# Altium PCB BeagleBoneBlack.PcbDoc
Units mil, origin at the board's own origin, x right, y up, seen from the top; angles counter-clockwise.
Board outline 2350 x 1350 mil, 2 copper layers (Top Layer, Bottom Layer); 14 components, 13 nets, 100 pads, 10 vias.
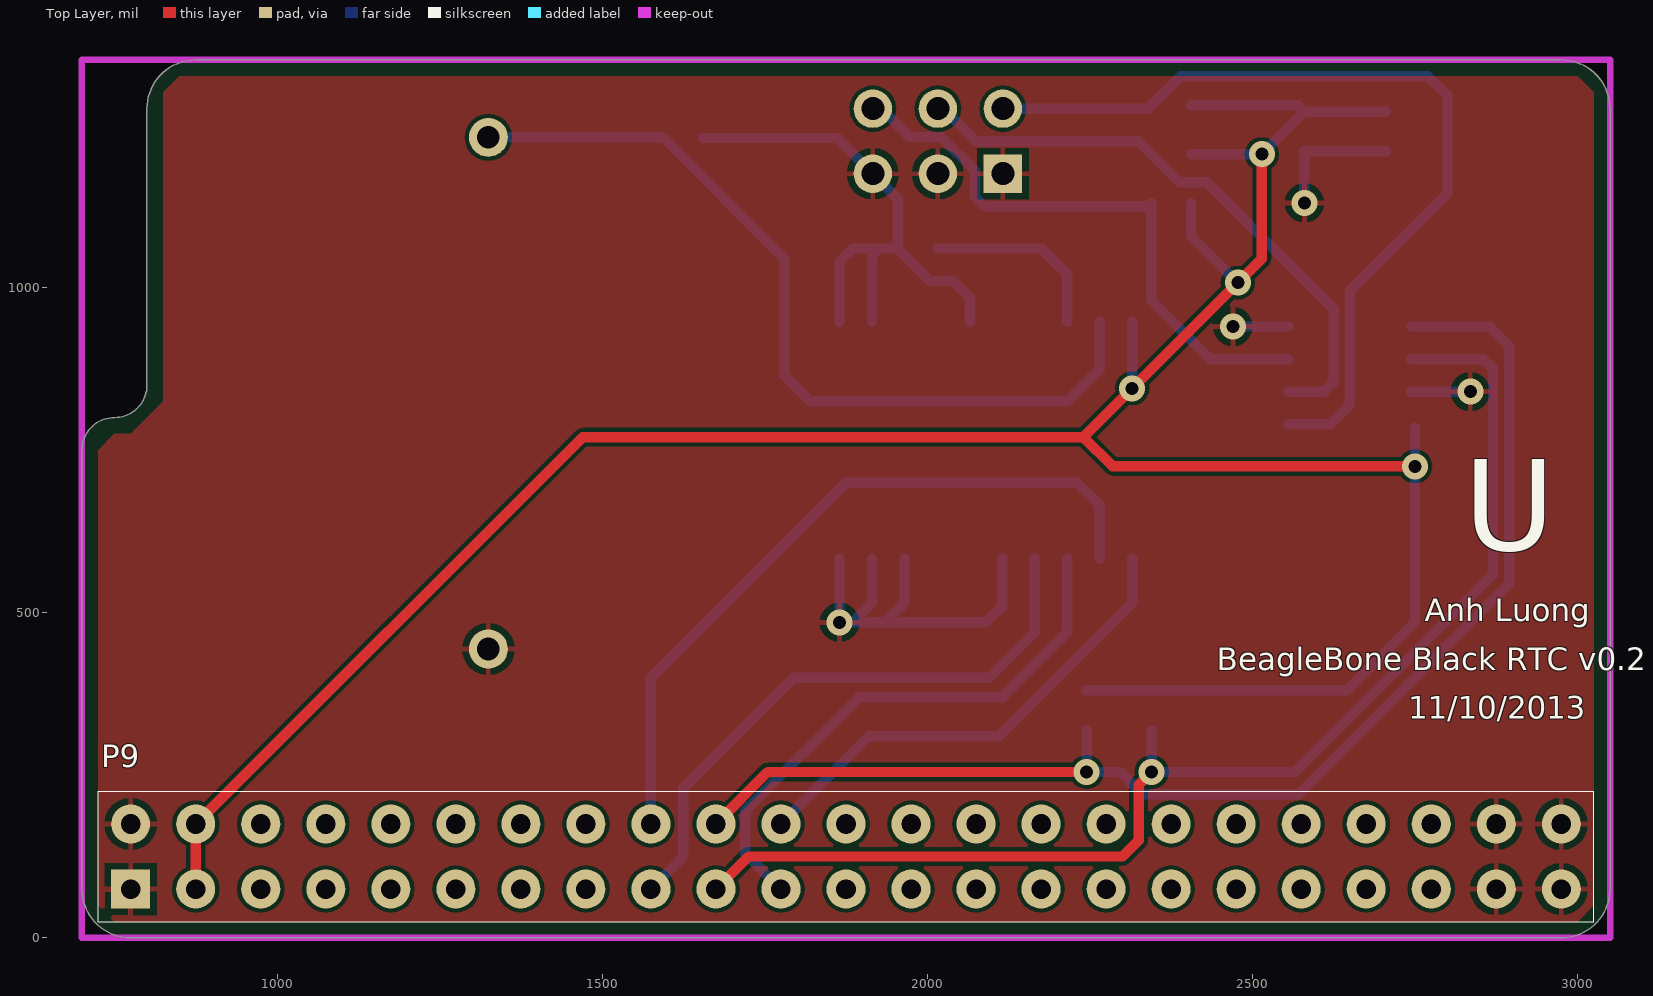
[diagram p0: Top Layer view]
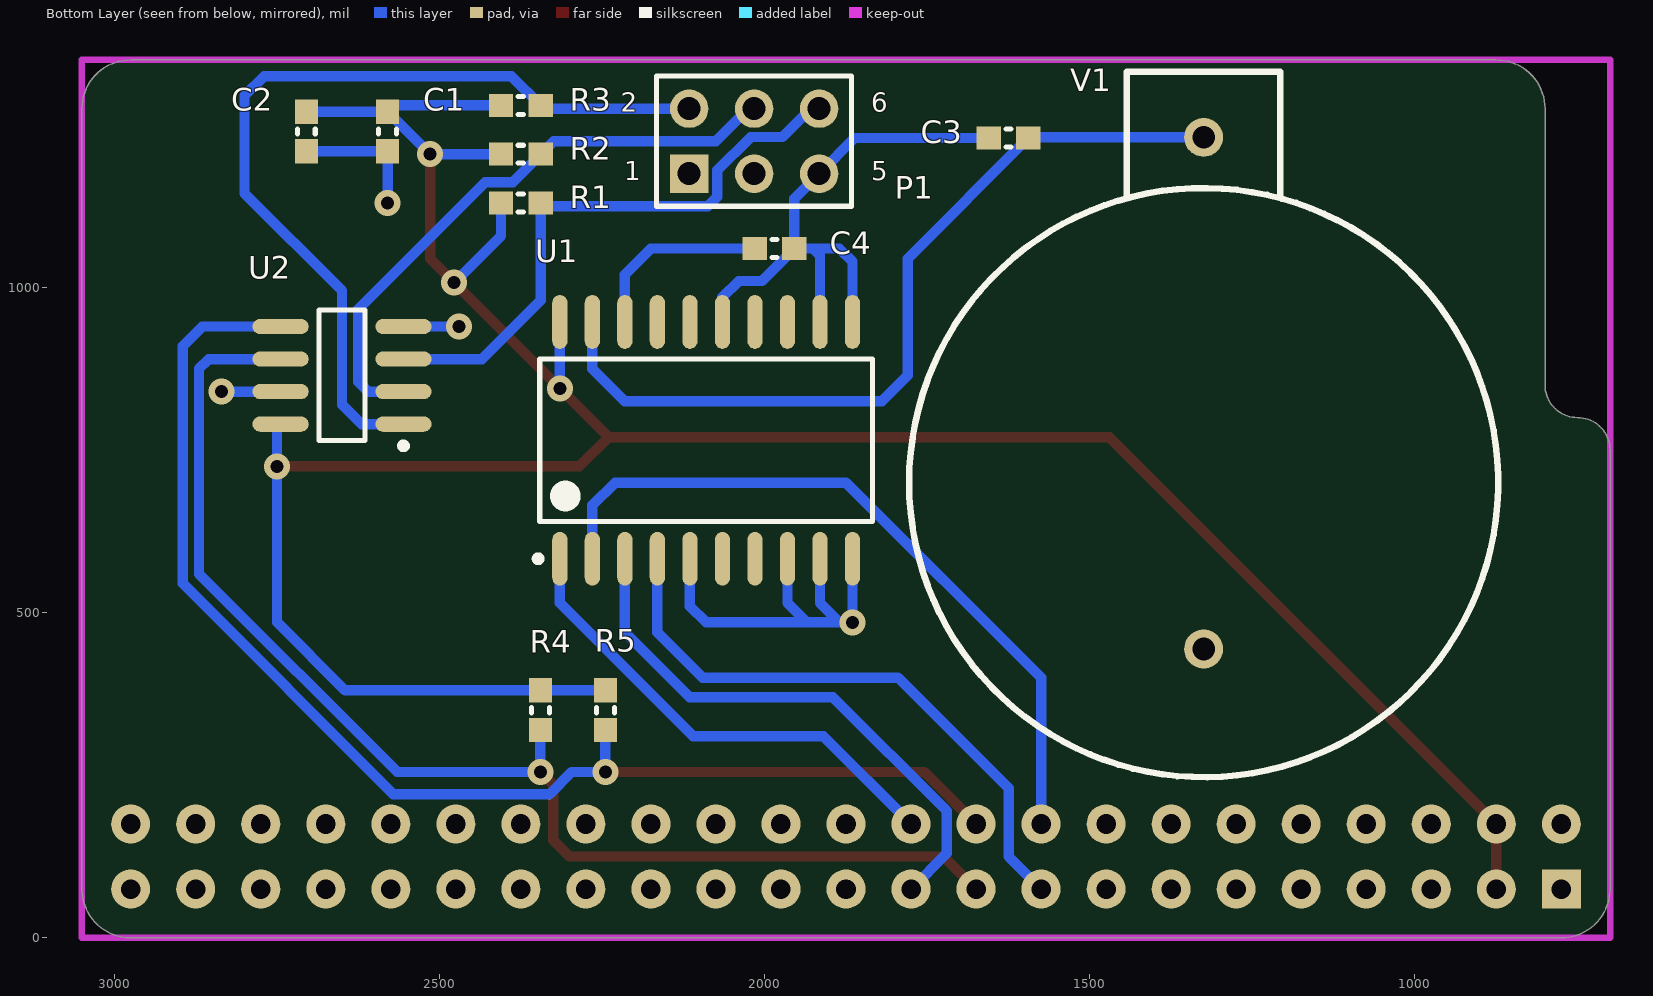
[diagram p1: Bottom Layer view, seen from below]

## Layer stack, top to bottom
Top Layer: signal copper 1.4
Dielectric: dielectric 12.6, FR-4, Dk 4.8
Bottom Layer: signal copper 1.4

## Board outline
775,0 cw(c775,75) 700,75 700,750 cw(c750,750) 750,800 ccw(c750,850) 800,850 800,1275 cw(c875,1275) 875,1350 2975,1350 cw(c2975,1275) 3050,1275 3050,75 cw(c2975,75) 2975,0

## Design rules (kind name [scope] priority, off if disabled: settings)
Clearance "Clearance~Sunstone Circuits" [All] p1: gap=6 // Sunstone Circuits Minimum Clearance Rule (MLB~4&6 Layer Designs)
HoleSize "HoleSize~Sunstone Circuits" [All] p1: absolutevalues=TRUE maxlimit=251 minlimit=8 maxpercent=80.000 minpercent=20.000 // Sunstone Circuits Hole Size Rule (MLB~4&6 Layer Designs)
HoleSize Testpoint [All] p2: absolutevalues=TRUE maxlimit=100 minlimit=1 maxpercent=80.000 minpercent=20.000
HoleSize TestPointUsage [All] p3: absolutevalues=TRUE maxlimit=100 minlimit=1 maxpercent=80.000 minpercent=20.000
MinimumAnnularRing "MinimumAnnularRing~Sunstone Circuits" [All] p1: minimumring=7 // Sunstone Circuits Minimum Annular Ring (MLB~4&6 Layer Designs)
PlaneClearance "PlaneClearance~Sunstone Circuits" [All] p1: clearance=12 // Sunstone Circuits Power Plane Clearance Rule (MLB~4&6 Layer Designs)
PlaneConnect "PlaneConnect~Sunstone Circuits" [All] p1: planeconnectstyle=Relief reliefexpansion=10 reliefentries=4 reliefconductorwidth=8 reliefairgap=10 // Sunstone Circuits Power Plane Connect Rule (MLB~4&6 Layer Designs)
PolygonConnect "PolygonConnect~Sunstone Circuits" [All] p1: connectstyle=Relief reliefconductorwidth=8 reliefentries=4 polygonreliefangle="90 Angle" airgapwidth=10 // Sunstone Circuits Polygon Connect Style (MLB~4&6 Layer Designs)
RoomDefinition BeagleBoneBlackRTC [InComponentClass('BeagleBoneBlackRTC')] p1: confinementstyle=ConfineIn formatcopy=TRUE lockcomponents=FALSE outline 3095,-55 660,-55 660,1400 3095,1400
RoutingVias "RoutingVias~Sunstone Circuits" [All] p1: holewidth=16 width=30 viastyle="Through Hole" minholewidth=8 minwidth=24 maxholewidth=20 maxwidth=40 // Sunstone Circuits Routing Vias Rule (MLB~4&6 Layer Designs)
ShortCircuit "ShortCircuit~Sunstone Circuits" [All] p1: allowed=FALSE // Sunstone Circuits Short Circuit Rule~Do Not Allow (MLB~4&6 Layer Designs)
SilkscreenOverComponentPads SilkToSolderMaskClearance [IsPad] p1: minsilkscreentomaskgap=10
SolderMaskExpansion "SolderMaskExpansion~Sunstone Circuits" [All] p1: expansion=3 // Sunstone Circuits Solder Mask Expansion Rule (MLB~4&6 Layer Designs)
ViasUnderSMD "ViasUnderSMD~Sunstone Circuits" [All] p1: allowed=FALSE // Sunstone Circuits Vias Under SMD~Do Not Allow (MLB~4&6 Layer Designs)
Width "Width~Sunstone Circuits" [All] p1: maxlimit=100 minlimit=6 preferedwidth=10 // Sunstone Circuits Minimum Width Rule (MLB~4&6 Layer Designs)
23 further rules are at their usual default settings.

## Components (designator, comment, footprint, x,y, rotation, side; value= is the part's Value field where it differs from the comment)
C1 "MURATA/GRM188R61C105KA93D" "CAPC1608X09N (0603)" 2580,1240 r90 bottom
C2 "MURATA/GRM188R61C105KA93D" "CAPC1608X09N (0603)" 2705,1240 r90 bottom
C3 "MURATA/GRM188R61C105KA93D" "CAPC1608X09N (0603)" 1625,1230 r180 bottom
C4 "MURATA/GRM188R61C105KA93D" "CAPC1608X09N (0603)" 1985,1060 r0 bottom
P1 "Header 3X2" HDR2X3 2116.25,1175 r180 bottom
P9 "FEMALE HEADER 2x23" HEADER23X2 1875,125 r0 top
R1 "4K7" RES0603 2375,1130 r0 bottom
R2 "4K7" RES0603 2375,1205 r0 bottom
R3 "4K7" RES0603 2375,1280 r0 bottom
R4 "5K6" RES0603 2345,350 r90 bottom
R5 "5K6" RES0603 2245,350 r90 bottom
U1 "NXP/PCF2127A" "NXP/PCF2127A SOT163-1" 2090,765 r90 bottom
U2 "AT24C32CN-SH-B" SOIC127P600X175-8N 2650,865 r0 bottom
V1 "BS-3" CR2032TH 1325,700 r0 bottom

## Footprints (in the part's own frame and the unit in brackets; to place one, negate y for a bottom-side part, rotate by r counter-clockwise, add the part's x,y. Pads: shape width x height; smd on the part's side, far side on the other; paste and mask are expansions set on the pad)
"CAPC1608X09N (0603)" [mm] "Chip Capacitor, 2-Leads, Body 1.6x0.8mm, IPC Medium Density"
  rect 0.95x0.9 smd: 1(-0.775,0) 2(0.775,0)
  silkscreen extent -0.1,-0.35 0.1,0.35, body extent -0.85,-0.45 0.85,0.45, height 0.9
CR2032TH [mil] "Through Hole"
  round 60 hole 35: 0(0,256) 1(0,-531)
  silkscreen extent -453,-632 453,453, body extent -453,-664 453,458, height 272
HDR2X3 [mm] "Connector; Header; 3x2 Position"
  rect 1.5x1.5 hole 0.9: 1(0,0)
  round 1.5 hole 0.9: 2(0,2.54) 3(2.54,0) 4(2.54,2.54) 5(5.08,0) 6(5.08,2.54)
  silkscreen extent -1.27,-1.27 6.35,3.81
HEADER23X2 [mil] "HEADER23X2"
  rect 60x60 hole 30 mask+2: 1(-1100,-50)
  round 60 hole 30 mask+2: 2(-1100,50) 3(-1000,-50) 4(-1000,50) 5(-900,-50) 6(-900,50) 7(-800,-50) 8(-800,50) 9(-700,-50) 10(-700,50) 11(-600,-50) 12(-600,50) 13(-500,-50) 14(-500,50) 15(-400,-50) 16(-400,50) 17(-300,-50) 18(-300,50) 19(-200,-50) 20(-200,50) 21(-100,-50) 22(-100,50) 23(0,-50) 24(0,50) 25(100,-50) 26(100,50) 27(200,-50) 28(200,50) 29(300,-50) 30(300,50) 31(400,-50) 32(400,50) 33(500,-50) 34(500,50) 35(600,-50) 36(600,50) 37(700,-50) 38(700,50) 39(800,-50) 40(800,50) 41(900,-50) 42(900,50) 43(1000,-50) 44(1000,50) 45(1100,-50) 46(1100,50)
  silkscreen extent -1150,-100 1150,100
"NXP/PCF2127A SOT163-1" [mm] "SOP, 20-Leads, Body 13.0x7.6mm (max), Pitch 1.27mm, IPC Medium Density"
  oval 2.1x0.6 smd: 1(-4.625,5.715) 2(-4.625,4.445) 3(-4.625,3.175) 4(-4.625,1.905) 5(-4.625,0.635) 6(-4.625,-0.635) 7(-4.625,-1.905) 8(-4.625,-3.175) 9(-4.625,-4.445) 10(-4.625,-5.715) 11(4.625,-5.715) 12(4.625,-4.445) 13(4.625,-3.175) 14(4.625,-1.905) 15(4.625,-0.635) 16(4.625,0.635) 17(4.625,1.905) 18(4.625,3.175) 19(4.625,4.445) 20(4.625,5.715)
  silkscreen extent -4.75,-6.5 3.17,6.69, body extent -5.15,-6.4 5.15,6.4, height 2.62
RES0603 [mm] "Chip Capacitor, 2-Leads, Body 1.6x0.8mm, IPC Medium Density"
  rect 0.95x0.9 smd: 1(-0.775,0) 2(0.775,0)
  silkscreen extent -0.1,-0.35 0.1,0.35, body extent -0.85,-0.45 0.85,0.45, height 0.9
SOIC127P600X175-8N [mm] "SOIC, 8-Leads, Body 4.92x3.90mm, Pitch 1.27mm, IPC Medium Density"
  oval 2.2x0.6 smd: 1(-2.4,1.905) 2(-2.4,0.635) 3(-2.4,-0.635) 4(-2.4,-1.905) 5(2.4,-1.905) 6(2.4,-0.635) 7(2.4,0.635) 8(2.4,1.905)
  silkscreen extent -2.52,-2.55 0.9,2.88, body extent -2,-2.55 2,2.55, height 1.75

## Part data
C1 C2 C3 C4: "Capacitor 0603 1uF"
P1: "Header, 3-Pin, Dual row"
P9: library part HDR_46_F_2_0.1_0.1, "CONN HEADER FMAL 46PS.1\" DL GOLD"
U1: "Integrated RTC, TCXO and quartz crystal"
U2: "SERIAL EEPROM 32K 1.8V,  8 PIN SOIC"
V1: "HOLDER COINCELL 2032 RETAINR ARM"

## Via types
v1: diameter 40, hole 20, Top Layer to Bottom Layer, tented both sides, 10 vias

## Nets (pads, with @x,y where several pads share a name; then routed paths per layer and width w, separated by ;. In a path a pad name is that pad's centre, name@x,y a point inside that pad or via, vN(x,y) a via of type N, cw(c..) or ccw(c..) an arc to the next point about the centre after c; other vN are vias at no path point)
GND: C1.1 C2.1 C3.1 C4.1 P1.1 P1.3 P1.5 P9.1 P9.2 P9.43 P9.44 P9.45 P9.46 U1.5 U1.8 U1.9 U1.10 U1.11 U1.12 U1.15 U2.4 U2.7 V1.0 | length 1931.9
  Bottom Layer w16: C3.1 1861.25,1230 P1.5 1954.49,1136.76 C4.1 ; U1.10 v1(1865,485) 1885,485 ; U1.11 1865,1040 1885,1060 1925,1060 ; U1.9 1915,515 1885,485 ; U1.12 1915,1050 1925,1060 ; 1940,490 1965,515 U1.8 ; U1.15 2065,985 2040,1010 2004.49,1010 C4.1 ; U1.5 2115,510 2090,485 1885,485 ; v1(2470,940) U2.4 ; v1@2580,1125 C1.1 C2.1 ; U2.7 v1(2835,840) ; 1925,1060 C4.1
  other v1: 2580,1130
I2C2_SCL: P9.19 R4.1 U2.6 | length 1956.9
  Top Layer w16: P9.19 1725,125 2300,125 2325,150 2325,235 v1(2345,255)
  Bottom Layer w16: R4.1 v1(2345,255) 2565,255 2870,560 2870,875 2855,890 U2.6
I2C2_SDA: P9.20 R5.1 U2.5 | length 1993.9
  Top Layer w16: P9.20 1755,255 v1(2245,255)
  Bottom Layer w16: R5.1 v1(2245,255) 2296.92,255 2330.92,221 2571,221 2895,545 2895,910 2865,940 U2.5
NetC4_2: C4.2 U1.18 | length 289
  Bottom Layer w16: C4.2 2175,1060 2215,1020 U1.18
NetP1_2: P1.2 R3.1 U2.1 | length 1353.9
  Bottom Layer w16: P1.2 R3.1@2339.49,1275 ; R3.1 2389.49,1325 2770,1325 2800,1295 2800,1145.07 2650,995.07 2650,820 2620,790 U2.1
NetP1_4: P1.4 R2.1 U2.2 | length 923.9
  Bottom Layer w16: P1.4 2025,1275 2075,1225 2324.49,1225 R2.1 2387.77,1161.72 2430.01,1161.72 2625,966.73 2625,855 2610,840 U2.2
NetP1_6: P1.6 R1.1 U2.3 | length 907
  Bottom Layer w16: P1.6 1929.2,1275 1972.72,1231.47 2021.34,1231.47 2072.72,1180.08 2072.72,1139.67 2087.4,1125 R1.1@2339.49,1125 ; R1.1 2344.49,980.51 2435,890 U2.3
SPI0_CS: P9.17 U1.4 | length 928
  Bottom Layer w16: P9.17 1625,125 1625,230 1795,400 2095,400 2165,470 U1.4
SPI0_D0: P9.21 U1.3 | length 864.6
  Bottom Layer w16: P9.21 1720,130 1720,195 1895,370 2115,370 2215,470 U1.3
SPI0_D1: P9.18 U1.2 | length 1135.8
  Bottom Layer w16: P9.18 1575,400 1875,700 2230,700 2265,665 U1.2
SPI0_SCLK: P9.22 U1.1 | length 748.8
  Bottom Layer w16: P9.22 1910,310 2110.07,310 2315,514.93 U1.1
VBAT: C3.2 U1.19 V1.1 | length 1306.1
  Bottom Layer w16: V1.1 1593.49,1231 C3.2 1780,1044.49 1780,865 1820,825 2215,825 2265,875 U1.19
VDD_3V3: C1.2 C2.2 P9.3 P9.4 R1.2 R2.2 R3.2 R4.2 R5.2 U1.20 U2.8 | length 4396
  Top Layer w16: P9.3 P9.4 1470,770 2240,770 ; v1(2514.49,1205) 2514.49,1044.49 v1(2477.5,1007.5) v1(2315,845) 2240,770 ; v1(2750,725) 2285,725 2240,770
  Bottom Layer w16: R5.2 R4.2 2645.51,380.51 2750,485 v1(2750,725) U2.8@2750,784.49 ; v1(2315,845) U1.20 ; R1.2 2405.51,1079.49 v1(2477.5,1007.5) ; R2.2 v1(2514.49,1205) C1.2 ; R3.2 2570.51,1280 C1.2 ; C2.2 C1.2
pads on no net: P9.5 P9.6 P9.7 P9.8 P9.9 P9.10 P9.11 P9.12 P9.13 P9.14 P9.15 P9.16 P9.23 P9.24 P9.25 P9.26 P9.27 P9.28 P9.29 P9.30 P9.31 P9.32 P9.33 P9.34 P9.35 P9.36 P9.37 P9.38 P9.39 P9.40 P9.41 P9.42 U1.6 U1.7 U1.13 U1.14 U1.16 U1.17

## Polygon pours and split planes (outlines as drawn)
GND on Top Layer "GP" (solid, pour order 7): 825,1300 850,1325 3000,1325 3025,1300 3025,50 3000,25 750,25 725,50 725,750 750,775 775,775 825,825

## Keep-outs
Keep-Out Layer:
  lines w10: 700,0 700,1350 3050,1350 3050,0 700,0

## Silkscreen, mask and mechanical layers (free items; w line width, h text height)
Top Overlay:
  text "U" at 2825,550 h240
  text "Anh Luong" at 2765,475 h60
  text "BeagleBone Black RTC v0.2" at 2445,400 h60
  text "11/10/2013" at 2740,325 h60
Mechanical 2:
  the board outline again, w1
Drill Drawing:
  text ".LEGEND" at 3600,200 h60
  text "Drill Drawing." at 3600,100 h60

## Dimensions
700,0 to 700,1350 on Mechanical 1
700,0 to 3050,0 on Mechanical 1

## Text inside footprints (layer, text, board x,y; h text height)
P1: Bottom Overlay "6" at 1836.25,1260 h50; Bottom Overlay "5" at 1836.25,1155 h50; Bottom Overlay "2" at 2221.25,1260 h50; Bottom Overlay "1" at 2216.25,1155 h50